# Altium PCB NXP_USB_Programmer.PcbDoc
Units mm, origin at the board's own origin, x right, y up, seen from the top; angles counter-clockwise.
Board outline 28 x 20.13 mm, 2 copper layers (Top Layer, Bottom Layer); 12 components, 12 nets, 68 pads, 21 vias.
Unrouted connection lines stored in the file: 1.
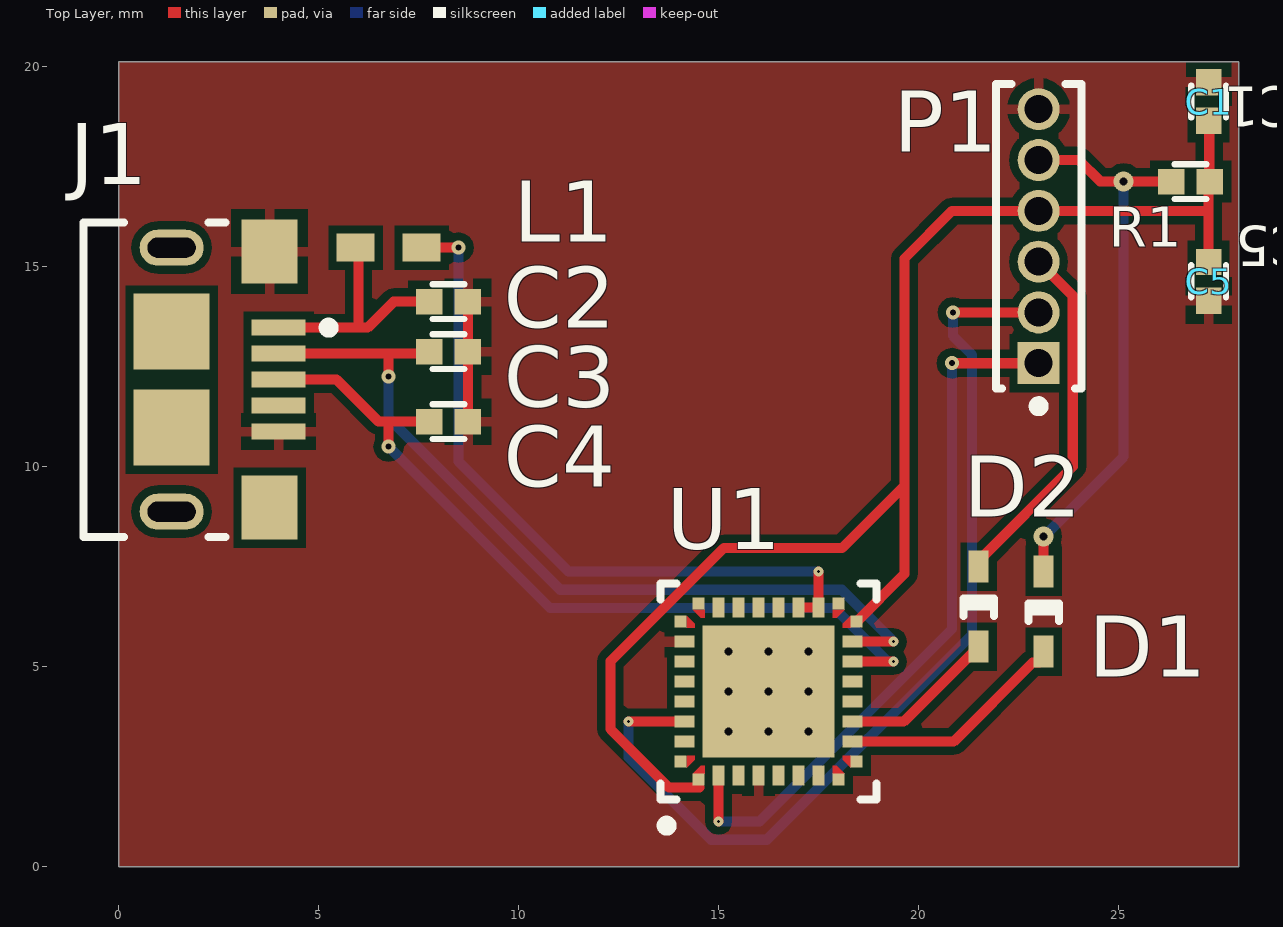
[diagram p0: Top Layer view]
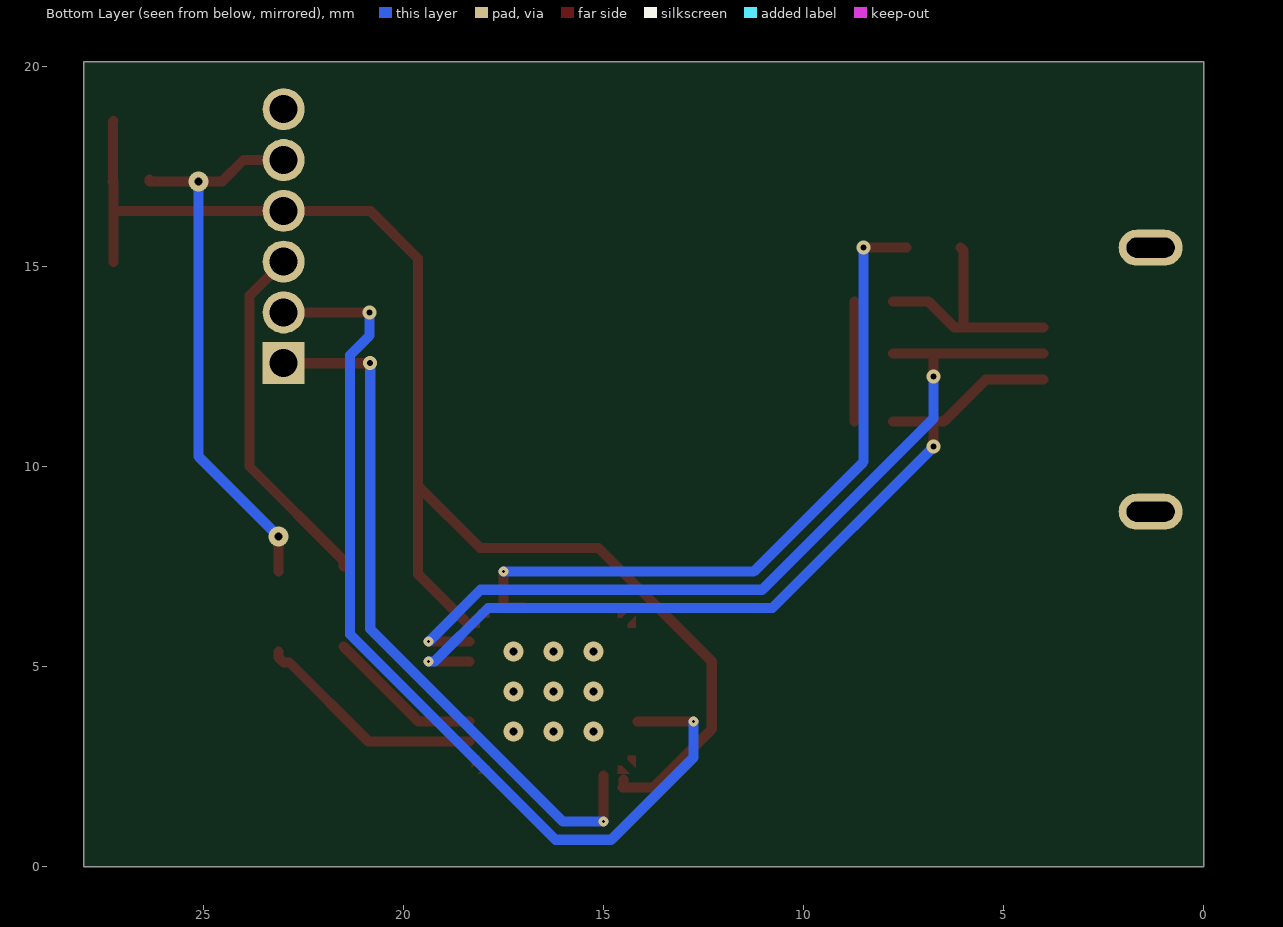
[diagram p1: Bottom Layer view, seen from below]

## Layer stack, top to bottom
Top Solder: solder mask 0.0102, Solder Resist, Dk 3.5
Top Layer: signal copper 0.0356
Dielectric 1: dielectric 0.32, FR-4, Dk 4.8
Bottom Layer: signal copper 0.0356
Bottom Solder: solder mask 0.0102, Solder Resist, Dk 3.5

## Board outline
0,0 28,0 28,20.125 0,20.125

## Design rules (kind name [scope] priority, off if disabled: settings)
Clearance [All] p1: gap=0.2 ignorepadtopadclearanceinfootprint=FALSE
MinimumSolderMaskSliver [All] p1: minsoldermaskwidth=0
PolygonConnect [All] p1: connectstyle=Relief reliefconductorwidth=0.254 reliefentries=4 polygonreliefangle="90 Angle" airgapwidth=0.254
RoutingVias [All] p1: holewidth=0.711 width=1.27 viastyle="Through Hole" minholewidth=0.01 minwidth=0.05 maxholewidth=0.711 maxwidth=2
SilkToSolderMaskClearance [IsPad] p1: minsilkscreentomaskgap=0.05 clearancetoexposedcopper=TRUE
SolderMaskExpansion [All] p1: expansion=0.102
Width [All] p1: maxlimit=0.254 minlimit=0.254 preferedwidth=0.254
28 further rules are at their usual default settings.

## Components (designator, comment, footprint, x,y, rotation, side; value= is the part's Value field where it differs from the comment)
C1 "CAP CER 0.1UF 16V X7R 0402" SM0402 27.25,19.125 r270 top
C2 "CAP CER 10000PF 16V X7R 0402" SM0402 8.25,14.125 r180 top value=10nF
C3 "CAP CER 47PF 50V NP0 0402" SM0402 8.25,12.875 r180 top
C4 "CAP CER 47PF 50V NP0 0402" SM0402 8.25,11.125 r180 top
C5 "CAP CER 0.1UF 16V X7R 0402" SM0402 27.25,14.635 r90 top
D1 "DIODE SCHOTTKY 30V 200MA SOD523" "DIODE SOD523" 23.125,6.375 r270 top
D2 "DIODE SCHOTTKY 30V 200MA SOD523" "DIODE SOD523" 21.5,6.5 r270 top
J1 "10118193-0001LF" FCI-10118193-0001LF-5_V 2.675,12.175 r270 top
L1 "FERRITE BEAD 470 OHM 0603 1LN" BLM18PG471SN1D 6.75,15.475 r0 top
P1 "CONN HEADER VERT 6POS 1.27MM" SLIN-GRPB061VWVN-RC_V 23,15.76 r90 top
R1 "RES 1K OHM 0.5% 1/16W 0402" SM0402 26.8,17.125 r0 top value="1000.00 Ohm"
U1 "FT232RQ-REEL" COM-UART-FT232R-SQ32 16.25,4.375 r90 top

## Footprints (in the part's own frame and the unit in brackets; to place one, negate y for a bottom-side part, rotate by r counter-clockwise, add the part's x,y. Pads: shape width x height; smd on the part's side, far side on the other; paste and mask are expansions set on the pad)
BLM18PG471SN1D [mm] "Chip Ferrite Bead, 2-Leads, Body 1.6x0.8mm, Height 0.95mm, Flow, 0.5 to 1.5A Rated Current"
  rect 0.95x0.7 smd: 1(-0.825,0) 2(0.825,0)
  body extent -0.8,-0.4 0.8,0.4, height 0.95
COM-UART-FT232R-SQ32 [mm] "QFN, 32-Leads, Body 5x5mm, Pitch 0.5mm, Thermal Pad 3.3x3.3mm, FTDI Recommended"
  rect 0.3x0.3 smd paste-0.15 mask-0.15: 1(-2.2,1.75) 8(-2.2,-1.75) 9(-1.75,-2.2) 16(1.75,-2.2) 17(2.2,-1.75) 24(2.2,1.75) 25(1.75,2.2) 32(-1.75,2.2)
  rect 0.5x0.3 smd paste-0.15 mask+0.06: 2(-2.1,1.25) 3(-2.1,0.75) 4(-2.1,0.25) 5(-2.1,-0.25) 6(-2.1,-0.75) 7(-2.1,-1.25) 18(2.1,-1.25) 19(2.1,-0.75) 20(2.1,-0.25) 21(2.1,0.25) 22(2.1,0.75) 23(2.1,1.25)
  rect 0.3x0.5 smd paste-0.15 mask+0.06: 10(-1.25,-2.1) 11(-0.75,-2.1) 12(-0.25,-2.1) 13(0.25,-2.1) 14(0.75,-2.1) 15(1.25,-2.1) 26(1.25,2.1) 27(0.75,2.1) 28(0.25,2.1) 29(-0.25,2.1) 30(-0.75,2.1) 31(-1.25,2.1)
  rect 3.3x3.3 smd paste-1.65 mask+0.06: 33(0,0)
  Top Layer region: 1.6,-1.85 1.6,-2.05 1.9,-2.05 1.7,-1.85
  Top Layer region: -1.6,2.05 -1.6,1.85 -1.7,1.85 -1.9,2.05
  Top Layer region: 1.6,2.05 1.6,1.85 1.7,1.85 1.9,2.05
  Top Layer region: -1.6,-2.05 -1.6,-1.85 -1.7,-1.85 -1.9,-2.05
  Top Layer region: -2.05,1.6 -1.85,1.6 -1.85,1.7 -2.05,1.9
  Top Layer region: 2.05,1.6 1.85,1.6 1.85,1.7 2.05,1.9
  Top Layer region: 2.05,-1.6 1.85,-1.6 1.85,-1.7 2.05,-1.9
  Top Layer region: -2.05,-1.6 -1.85,-1.6 -1.85,-1.7 -2.05,-1.9
  silkscreen extent -3.47,-2.7 2.7,2.7, body extent -2.55,-2.55 2.55,2.55, height 1
"DIODE SOD523" [mm] "SMD, 2-Leads, Body 1.2x0.8mm, Height 0.7mm"
  rect 0.8x0.5 smd: 1(-1,0) 2(1,0)
  silkscreen extent -0.2,-0.38 0.24,0.38, body extent -0.6,-0.4 0.6,0.4, height 0.71
FCI-10118193-0001LF-5_V [mm] "Micro, USB-B, 5-Leads, Body 7.86x5.05mm, Pitch 0.65 mm"
  rect 0.4x1.35 smd: 1(-1.3,1.325) 2(-0.65,1.325) 3(0,1.325) 4(0.65,1.325) 5(1.3,1.325)
  rect 1.6x1.4 smd: 6(-3.2,1.1) 7(3.2,1.1)
  rect 1.9x1.9 smd: 8(-1.2,-1.35) 9(1.2,-1.35)
  oval 0.9x1.6 hole 0.5 slot 1.2 at 90 deg: 10(-3.3,-1.35) 11(3.3,-1.35)
  silkscreen extent -3.93,-3.55 3.93,2.7, body extent -3.93,-4.16 3.93,1.5, height 2.83
SLIN-GRPB061VWVN-RC_V [mm] "Header, 6-Leads, Body 7.62x2.14mm, Pitch 1.27mm"
  rect 1.05x1.05 hole 0.7: 1(-3.175,0)
  round 1.05 hole 0.7: 2(-1.905,0) 3(-0.635,0) 4(0.635,0) 5(1.905,0) 6(3.175,0)
  silkscreen extent -4.37,-1.07 3.81,1.07, body extent -3.81,-1.07 3.81,1.07, height 4
SM0402 [mil]
  rect 26x25 smd: 1(-19,0) 2(19,0)
  silkscreen extent -16,-17 16,17, body extent -20,-10 20,10, height 22

## Part data
C1 C5: library part CC0402KRX7R7BB104, "0.1µF ±10% 16V Ceramic Capacitor X7R 0402 (1005 Metric)", Capacitance=100nF, Case/Package=0402, Case Code (Metric)=1005, Dielectric=X7R, Manufacturer=Yageo, Max Operating Temperature=125°C, Min Operating Temperature=-55°C, Package Quantity=1, Supplier Part Number 1=311-1338-1-ND, Tolerance=10%, Voltage=16V, Case Code (Imperial)=0402, ComponentLink1Description=CC0402KRX7R7BB104, ComponentLink1URL=https://www.digikey.com/products/en/capacitors/ceramic-capacitors/60?k=CC0402KRX7R7BB104&k=&pkeyword=CC0402KRX7R7BB104&sv=0&pv7=2&sf=0&quantity=&ColumnSort=0&page=1&pageSize=25, ComponentLink2Description=https://datasheet.ciiva.com/11788/0900766b80ce67ed-11788364.pdf?src-supplier=RSComponents, ComponentLink2URL=https://datasheet.ciiva.com/11788/0900766b80ce67ed-11788364.pdf?src-supplier=RSComponents, ComponentLink3Description=https://datasheet.ciiva.com/16625/upy-gphc-x7r-6-3v-to-50v-8-16625511.pdf?src-supplier=Avnet+Europe, ComponentLink3URL=https://datasheet.ciiva.com/16625/upy-gphc-x7r-6-3v-to-50v-8-16625511.pdf?src-supplier=Avnet+Europe, ComponentLink4Description=https://datasheet.ciiva.com/161/mlccorderingcode-161544.pdf?src-supplier=Digi-Key, ComponentLink4URL=https://datasheet.ciiva.com/161/mlccorderingcode-161544.pdf?src-supplier=Digi-Key, ComponentLink5Description=https://datasheet.ciiva.com/161/mlccorderingcode-161545.pdf?src-supplier=Digi-Key, ComponentLink5URL=https://datasheet.ciiva.com/161/mlccorderingcode-161545.pdf?src-supplier=Digi-Key, ComponentLink6Description=https://datasheet.ciiva.com/11587/upy-gphc-x7r-6-3v-to-50v-8-11587305.pdf?src-supplier=Avnet, ComponentLink6URL=https://datasheet.ciiva.com/11587/upy-gphc-x7r-6-3v-to-50v-8-11587305.pdf?src-supplier=Avnet, ComponentLink7Description=https://datasheet.ciiva.com/161/mlccorderingcode-161546.pdf?src-supplier=Digi-Key, ComponentLink7URL=https://datasheet.ciiva.com/161/mlccorderingcode-161546.pdf?src-supplier=Digi-Key, ComponentLink8Description=https://datasheet.ciiva.com/13395/upy-gphc-x7r-6-3v-to-50v-8-13395676.pdf?src-supplier=Mouser, ComponentLink8URL=https://datasheet.ciiva.com/13395/upy-gphc-x7r-6-3v-to-50v-8-13395676.pdf?src-supplier=Mouser, ComponentLink9Description=https://datasheet.ciiva.com/8033/1734573-8033661.pdf?src-supplier=Element14, ComponentLink9URL=https://datasheet.ciiva.com/8033/1734573-8033661.pdf?src-supplier=Element14, ComponentLink10Description=https://datasheet.ciiva.com/7978/1489800-7978111.pdf?src-supplier=Element14, ComponentLink10URL=https://datasheet.ciiva.com/7978/1489800-7978111.pdf?src-supplier=Element14, ComponentLink11Description=https://datasheet.ciiva.com/8033/1734573-8033663.pdf?src-supplier=Element14, ComponentLink11URL=https://datasheet.ciiva.com/8033/1734573-8033663.pdf?src-supplier=Element14, ComponentLink12Description=https://datasheet.ciiva.com/28450/1489800-28450335.pdf?src-supplier=Element14, ComponentLink12URL=https://datasheet.ciiva.com/28450/1489800-28450335.pdf?src-supplier=Element14, Composition=Ceramic, Depth=0.5mm, Halogen Free="Halogen Free", Height=0.5mm, Lead Free="Lead Free", Length=1mm, Manufacturer Part Number=CC0402KRX7R7BB104, Mount="Surface Mount", Number of Pins=2, Packaging="Tape and Reel", Pricing 1="1 = 0.10000, 10 = 0.03800, 100 = 0.01700, 500 = 0.01216, 1000 = 0.00956, 2500 = 0.00869, 5000 = 0.00799 (USD)", Radiation Hardening=No, REACH SVHC="No SVHC", Stock 1=38597495, Supplier 1=Digi-Key, Termination=SMD/SMT, Thickness=0.022inch, Voltage Rating=16V, Voltage Rating (DC)=16V, Width=0.02inch
C2: library part C0402C103K4RALTU, "10000pF ±10% 16V Ceramic Capacitor X7R 0402 (1005 Metric)", Capacitance=10nF, Case-EIA=0402, Case-Metric=1005, Dielectric=X7R, Dielectric Material=Ceramic, Manufacturer=KEMET, Max Operating Temperature=125°C, Min Operating Temperature=-55°C, Package Quantity=1, Rated Voltage="16 V", Supplier Part Number 1=399-6340-1-ND, Tolerance=±10%, Voltage Rating=16V, Case/Package=0402, Case Code (Imperial)=0402, Case Code (Metric)=1005, ComponentLink1Description=C0402C103K4RALTU, ComponentLink1URL=https://www.digikey.com/products/en/capacitors/ceramic-capacitors/60?k=C0402C103K4RALTU&k=&pkeyword=C0402C103K4RALTU&sv=0&pv7=2&sf=0&quantity=&ColumnSort=0&page=1&pageSize=25, ComponentLink2Description=http://components.arrow.com/part/dataview/46124281S9906155N7429?src-supplier=Arrow, ComponentLink2URL=http://components.arrow.com/part/dataview/46124281S9906155N7429?src-supplier=Arrow, ComponentLink3Description=http://www.mouser.com/ds/2/212/KEM_C1018_X7R_SnPb_SMD-1102795.pdf?src-supplier=Mouser, ComponentLink3URL=http://www.mouser.com/ds/2/212/KEM_C1018_X7R_SnPb_SMD-1102795.pdf?src-supplier=Mouser, ComponentLink4Description=https://search.kemet.com/component-edge/download/datasheet/C0402C103K4RALTU.pdf?src-supplier=Digi-Key, ComponentLink4URL=https://search.kemet.com/component-edge/download/datasheet/C0402C103K4RALTU.pdf?src-supplier=Digi-Key, ComponentLink5Description=https://api.kemet.com/component-edge/download/datasheet/C0402C103K4RALTU.pdf?src-supplier=Digi-Key, ComponentLink5URL=https://api.kemet.com/component-edge/download/datasheet/C0402C103K4RALTU.pdf?src-supplier=Digi-Key, ComponentLink6Description=http://datasheet.octopart.com/C0402C103K4RALTU-Kemet-datasheet-62307648.pdf?src-supplier=Element14, ComponentLink6URL=http://datasheet.octopart.com/C0402C103K4RALTU-Kemet-datasheet-62307648.pdf?src-supplier=Element14, ComponentLink7Description=http://datasheet.octopart.com/C0402C103K4RALTU-KEMET-datasheet-83561409.pdf?src-supplier=Newark, ComponentLink7URL=http://datasheet.octopart.com/C0402C103K4RALTU-KEMET-datasheet-83561409.pdf?src-supplier=Newark, ComponentLink8Description=http://datasheet.octopart.com/C0402C103K4RALTU-KEMET-datasheet-86448208.pdf?src-supplier=Farnell, ComponentLink8URL=http://datasheet.octopart.com/C0402C103K4RALTU-KEMET-datasheet-86448208.pdf?src-supplier=Farnell, ComponentLink9Description=http://datasheet.octopart.com/C0402C103K4RALTU-KEMET-datasheet-84169754.pdf, ComponentLink9URL=http://datasheet.octopart.com/C0402C103K4RALTU-KEMET-datasheet-84169754.pdf, Depth=0.5mm, Dissipation Factor=3.5%, Height=0.5mm, Length=1mm, Manufacturer Part Number=C0402C103K4RALTU, Max Thickness="0.6 mm", Mount="Surface Mount", Packaging="Tape and Reel", Pricing 1="1 = 0.76000, 10 = 0.56400, 100 = 0.38640, 500 = 0.30590, 1000 = 0.25760, 2500 = 0.24150, 5000 = 0.23345 (USD)", Radiation Hardening=No, Stock 1=75494, Supplier 1=Digi-Key, Technology=SMT, Termination=SMD/SMT, Thickness=0.022inch, Voltage Rating (DC)=16V, Width=0.02inch
C3 C4: library part C0402C470D5GACTU, "47pF ±0.5pF 50V Ceramic Capacitor C0G, NP0 0402 (1005 Metric)", Capacitance=47pF, Case/Package=0402, Case Code (Metric)=1005, Dielectric=C0G, Dielectric Material=Ceramic, Manufacturer=KEMET, Max Operating Temperature=125°C, Min Operating Temperature=-55°C, Package Quantity=10000, Supplier Part Number 1=C0402C470D5GACTU-ND, Voltage Rating=50V, Case Code (Imperial)=0402, ComponentLink1Description=C0402C470D5GACTU, ComponentLink1URL=https://www.digikey.com/product-detail/en/C0402C470D5GACTU/C0402C470D5GACTU-ND/2196707?utm_campaign=buynow&WT.z_cid=ref_octopart_dkc_buynow&utm_medium=aggregator&curr=usd&site=us&utm_source=octopart, ComponentLink2Description=https://datasheet.ciiva.com/5421/kem-c1003-c0g-smd-5421883.pdf?src-supplier=Mouser, ComponentLink2URL=https://datasheet.ciiva.com/5421/kem-c1003-c0g-smd-5421883.pdf?src-supplier=Mouser, ComponentLink3Description=http://datasheet.octopart.com/C0402C470D5GACTU-KEMET-datasheet-84169754.pdf, ComponentLink3URL=http://datasheet.octopart.com/C0402C470D5GACTU-KEMET-datasheet-84169754.pdf, Height=0.5mm, Lead Free="Lead Free", Lead Pitch=0.3mm, Length=0.039inch, Manufacturer Part Number=C0402C470D5GACTU, Mount="Surface Mount", Packaging="Tape and Reel", Pricing 1="10000 = 0.39203 (USD)", Stock 1=0, Supplier 1=Digi-Key, Termination=SMD/SMT, Thickness=0.022inch, Voltage Rating (DC)=50V, Width=0.02inch
D1 D2: library part RB521S30,115, "Schottky Barrier Diode, 30 V, 0.2 A, -55 to 125 degC, 2-Pin SOD523F, RoHS, Tape and Reel", Capacitance @ Vr, F="20pF @ 1V, 1MHz", Current - Average Rectified (Io)="200mA (DC)", Manufacturer=Nexperia, Supplier Part Number 1=1727-6493-1-ND, ComponentLink1Description=RB521S30,115, ComponentLink1URL=https://www.digikey.com/product-detail/en/nexperia-usa-inc/RB521S30115/1727-6493-1-ND/2773925, ComponentLink2Description=http://datasheet.octopart.com/RB521S30%2C115-Nexperia-datasheet-87582339.pdf?src-supplier=Nexperia, ComponentLink2URL=http://datasheet.octopart.com/RB521S30%2C115-Nexperia-datasheet-87582339.pdf?src-supplier=Nexperia, ComponentLink3Description=http://datasheet.octopart.com/RB521S30%2C115-Nexperia-datasheet-10674343.pdf?src-supplier=NXP+Semiconductors, ComponentLink3URL=http://datasheet.octopart.com/RB521S30%2C115-Nexperia-datasheet-10674343.pdf?src-supplier=NXP+Semiconductors, ComponentLink4Description=http://datasheet.octopart.com/RB521S30%2C115-Philips-datasheet-14055121.pdf?src-supplier=IIIC, ComponentLink4URL=http://datasheet.octopart.com/RB521S30%2C115-Philips-datasheet-14055121.pdf?src-supplier=IIIC, Manufacturer Part Number=RB521S30,115, Pricing 1="1 = 0.27000, 10 = 0.22100, 100 = 0.11740, 500 = 0.07726, 1000 = 0.05253 (USD)", Stock 1=15636, Supplier 1=Digi-Key
J1: "USB - micro B USB 2.0 Receptacle Connector 5 Position Surface Mount, Right Angle; Through Hole", Manufacturer="Amphenol ICC", ComponentLink1Description=609-4616-1-ND, ComponentLink1URL=https://www.digikey.com/products/en/connectors-interconnects/usb-dvi-hdmi-connectors/312?k=10118193-0001LF&k=&pkeyword=10118193-0001LF&sv=0&pv7=2&sf=0&quantity=&ColumnSort=0&page=1&pageSize=25, ComponentLink2Description=http://datasheet.octopart.com/10118193-0001LF-FCI-datasheet-55953155.pdf?src-supplier=TME, ComponentLink2URL=http://datasheet.octopart.com/10118193-0001LF-FCI-datasheet-55953155.pdf?src-supplier=TME, ComponentLink3Description=http://datasheet.octopart.com/10118193-0001LF-FCI-datasheet-11792339.pdf?src-supplier=Arrow, ComponentLink3URL=http://datasheet.octopart.com/10118193-0001LF-FCI-datasheet-11792339.pdf?src-supplier=Arrow, ComponentLink4Description=http://datasheet.octopart.com/10118193-0001LF-FCI-datasheet-13702206.pdf?src-supplier=Allied+Electronics, ComponentLink4URL=http://datasheet.octopart.com/10118193-0001LF-FCI-datasheet-13702206.pdf?src-supplier=Allied+Electronics, ComponentLink5Description=http://datasheet.octopart.com/10118193-0001LF-Amphenol-datasheet-96019471.pdf?src-supplier=Newark, ComponentLink5URL=http://datasheet.octopart.com/10118193-0001LF-Amphenol-datasheet-96019471.pdf?src-supplier=Newark, ComponentLink6Description=http://datasheet.octopart.com/10118193-0001LF-Amphenol-ICC-datasheet-96019471.pdf?src-supplier=Element14, ComponentLink6URL=http://datasheet.octopart.com/10118193-0001LF-Amphenol-ICC-datasheet-96019471.pdf?src-supplier=Element14, ComponentLink7Description=http://datasheet.octopart.com/10118193-0001LF-Amphenol-ICC-datasheet-55953155.pdf?src-supplier=Future+Electronics, ComponentLink7URL=http://datasheet.octopart.com/10118193-0001LF-Amphenol-ICC-datasheet-55953155.pdf?src-supplier=Future+Electronics, ComponentLink8Description=http://datasheet.octopart.com/10118193-0001LF-Amphenol-ICC-datasheet-116246833.pdf?src-supplier=Future+Electronics, ComponentLink8URL=http://datasheet.octopart.com/10118193-0001LF-Amphenol-ICC-datasheet-116246833.pdf?src-supplier=Future+Electronics, ComponentLink9Description=http://datasheet.octopart.com/10118193-0001LF-ICC-datasheet-96019471.pdf?src-supplier=Farnell, ComponentLink9URL=http://datasheet.octopart.com/10118193-0001LF-ICC-datasheet-96019471.pdf?src-supplier=Farnell, ComponentLink10Description=http://datasheet.octopart.com/10118193-0001LF-ICC-datasheet-55953155.pdf?src-supplier=Farnell, ComponentLink10URL=http://datasheet.octopart.com/10118193-0001LF-ICC-datasheet-55953155.pdf?src-supplier=Farnell, Description2="Conn Micro USB Type B", Manufacturer Part Number=10118193-0001LF, Pricing 1="1200 = 0.20150, 2400 = 0.18370, 4800 = 0.17130, 9600 = 0.15910, 24000 = 0.15810, 1 = 0.42060, 10 = 0.30000, 25 = 0.29990, 100 = 0.28820, 250 = 0.28160, 500 = 0.24750, 1000 = 0.24300, 3000 = 0.19000, 6000 = 0.17370 (USD)", Stock 1=8400, Supplier 1="Arrow Electronics Inc.", Supplier Part Number 1=10118193-0001LF
L1: library part BLM18PG471SN1D, "470 Ohms @ 100MHz 1 Power Line Ferrite Bead 0603 (1608 Metric) 1A 200mOhm", Case/Package=0603, Case Code (Metric)=1608, Current Rating=1A, DC Resistance (DCR)=200mR, Manufacturer=Murata, Max Operating Temperature=125°C, Min Operating Temperature=-55°C, Package Quantity=1, Supplier Part Number 1=490-5223-1-ND, Test Frequency=100MHz, Tolerance=25%, Case Code (Imperial)=0603, ComponentLink1Description="Manufacturer URL", ComponentLink1URL=http://www.murata.com/, ComponentLink2Description=Datasheet, ComponentLink2URL=http://www.murata.com/products/catalog/pdf/c31e.pdf, ComponentLink3Description="Package Specification", ComponentLink3URL=http://www.murata.com/products/catalog/pdf/c31e.pdf, ComponentLink4Description=BLM18PG471SN1D, ComponentLink4URL=https://www.digikey.com/products/en/filters/ferrite-beads-and-chips/841?k=BLM18PG471SN1D&k=&pkeyword=BLM18PG471SN1D&sv=0&pv7=2&sf=0&quantity=&ColumnSort=0&page=1&pageSize=25, ComponentLink5Description=https://datasheet.ciiva.com/11800/0900766b81275ca5-11800885.pdf?src-supplier=RSComponents, ComponentLink5URL=https://datasheet.ciiva.com/11800/0900766b81275ca5-11800885.pdf?src-supplier=RSComponents, ComponentLink6Description=https://datasheet.ciiva.com/8021/1740433-8021497.pdf?src-supplier=Element14, ComponentLink6URL=https://datasheet.ciiva.com/8021/1740433-8021497.pdf?src-supplier=Element14, ComponentLink7Description=https://datasheet.ciiva.com/6212/l0110s0100blm18p-6212508.pdf?src-supplier=Digi-Key, ComponentLink7URL=https://datasheet.ciiva.com/6212/l0110s0100blm18p-6212508.pdf?src-supplier=Digi-Key, ComponentLink8Description=https://datasheet.ciiva.com/6212/l0110s0100blm18p-6212509.pdf?src-supplier=Digi-Key, ComponentLink8URL=https://datasheet.ciiva.com/6212/l0110s0100blm18p-6212509.pdf?src-supplier=Digi-Key, ComponentLink9Description=https://datasheet.ciiva.com/16331/l0110s0100blm18p-16331542.pdf?src-supplier=Future+Electronics, ComponentLink9URL=https://datasheet.ciiva.com/16331/l0110s0100blm18p-16331542.pdf?src-supplier=Future+Electronics, ComponentLink10Description=https://datasheet.ciiva.com/6212/l0110s0100blm18p-6212506.pdf?src-supplier=Digi-Key, ComponentLink10URL=https://datasheet.ciiva.com/6212/l0110s0100blm18p-6212506.pdf?src-supplier=Digi-Key, ComponentLink11Description=https://datasheet.ciiva.com/8021/1740433-8021498.pdf?src-supplier=Element14, ComponentLink11URL=https://datasheet.ciiva.com/8021/1740433-8021498.pdf?src-supplier=Element14, ComponentLink12Description=https://datasheet.ciiva.com/14122/blm-series-eng-tds-14122876.pdf?src-supplier=Distrelec, ComponentLink12URL=https://datasheet.ciiva.com/14122/blm-series-eng-tds-14122876.pdf?src-supplier=Distrelec, ComponentLink13Description=https://datasheet.ciiva.com/8508/l0110s0100blm18p-8508303.pdf?src-supplier=Avnet, ComponentLink13URL=https://datasheet.ciiva.com/8508/l0110s0100blm18p-8508303.pdf?src-supplier=Avnet, ComponentLink14Description=http://datasheet.octopart.com/BLM18PG471SN1D-Murata-datasheet-11754816.pdf?src-supplier=Element14, ComponentLink14URL=http://datasheet.octopart.com/BLM18PG471SN1D-Murata-datasheet-11754816.pdf?src-supplier=Element14, ComponentLink15Description=http://datasheet.octopart.com/BLM18PG471SN1D-Murata-datasheet-8326388.pdf?src-supplier=_legacy+Avnet, ComponentLink15URL=http://datasheet.octopart.com/BLM18PG471SN1D-Murata-datasheet-8326388.pdf?src-supplier=_legacy+Avnet, ComponentLink16Description=http://datasheet.octopart.com/BLM18PG471SN1D-Murata-datasheet-503348.pdf?src-supplier=_legacy+Avnet, ComponentLink16URL=http://datasheet.octopart.com/BLM18PG471SN1D-Murata-datasheet-503348.pdf?src-supplier=_legacy+Avnet, ComponentLink17Description=http://datasheet.octopart.com/BLM18PG471SN1D-Murata-datasheet-35449.pdf?src-supplier=Farnell, ComponentLink17URL=http://datasheet.octopart.com/BLM18PG471SN1D-Murata-datasheet-35449.pdf?src-supplier=Farnell, ComponentLink18Description=http://datasheet.octopart.com/BLM18PG471SN1D-Murata-datasheet-62086344.pdf?src-supplier=Future+Electronics, ComponentLink18URL=http://datasheet.octopart.com/BLM18PG471SN1D-Murata-datasheet-62086344.pdf?src-supplier=Future+Electronics, ComponentLink19Description=http://datasheet.octopart.com/BLM18PG471SN1D-Murata-datasheet-62117746.pdf?src-supplier=TME, ComponentLink19URL=http://datasheet.octopart.com/BLM18PG471SN1D-Murata-datasheet-62117746.pdf?src-supplier=TME, ComponentLink20Description=http://datasheet.octopart.com/BLM18PG471SN1D-Murata-datasheet-37129980.pdf, ComponentLink20URL=http://datasheet.octopart.com/BLM18PG471SN1D-Murata-datasheet-37129980.pdf, Core Material=Ferrite, DC Current=1A, Depth=0.8mm, Height=0.8mm, Impedance=470R, Lead Free="Lead Free", Length=1.6mm, Manufacturer Part Number=BLM18PG471SN1D, Material=Steel, Max Current Rating=1A, Max DC Current=1A, Military Standard=Not, Number of Circuits=1, Number of Lines=1, Number of Pins=2, Packaging="Tape and Reel", Pricing 1="1 = 0.10000, 10 = 0.07600, 25 = 0.06840, 50 = 0.05000, 100 = 0.04330, 250 = 0.03416, 500 = 0.02884, 1000 = 0.02429 (USD)", Radiation Hardening=No, REACH SVHC="No SVHC", Resistance=200mR, Stock 1=2280, Supplier 1=Digi-Key, Termination=SMD/SMT, Width=0.8mm
P1: library part GRPB061VWVN-RC, "Connector Header Through Hole 6 position 0.050\" (1.27mm)", Manufacturer=Sullins, Package Quantity=1, Supplier Part Number 1=S9014E-06-ND, ComponentLink1Description=GRPB061VWVN-RC, ComponentLink1URL=https://www.digikey.com/products/en?keywords=GRPB061VWVN-RC, ComponentLink2Description=https://datasheet.ciiva.com/726/71-grpb-1vwvn-rc-10957-c-726652.pdf?src-supplier=Digi-Key, ComponentLink2URL=https://datasheet.ciiva.com/726/71-grpb-1vwvn-rc-10957-c-726652.pdf?src-supplier=Digi-Key, ComponentLink3Description=http://datasheet.octopart.com/GRPB061VWVN-RC-Sullins-datasheet-12514290.pdf?src-supplier=Future+Electronics, ComponentLink3URL=http://datasheet.octopart.com/GRPB061VWVN-RC-Sullins-datasheet-12514290.pdf?src-supplier=Future+Electronics, ComponentLink4Description=http://datasheet.octopart.com/GRPB061VWVN-RC-Sullins-datasheet-34148777.pdf?src-supplier=Future+Electronics, ComponentLink4URL=http://datasheet.octopart.com/GRPB061VWVN-RC-Sullins-datasheet-34148777.pdf?src-supplier=Future+Electronics, Connector Type="Male Pin", Contact Mating Length=0.118inch, Contact Plating=Gold, Lead Free="Lead Free", Manufacturer Part Number=GRPB061VWVN-RC, Mount="Through Hole", Number of Positions=6, Number of Rows=1, Packaging=Bulk, Pitch=0.05inch, Pricing 1="1 = 0.48000, 10 = 0.44800, 100 = 0.34360, 500 = 0.29880, 1000 = 0.24651, 5000 = 0.21663, 10000 = 0.21580 (USD)", Stock 1=23780, Supplier 1=Digi-Key, Termination=Solder
R1: library part RNCF0402DTE1K00, "1 kOhms ±0.5% 0.063W, 1/16W Chip Resistor 0402 (1005 Metric) Automotive AEC-Q200 Thin Film", Case-EIA=0402, Case-Metric=1005, Manufacturer="Stackpole Electronics", Max Operating Temperature=155°C, Min Operating Temperature=-55°C, Power="0.063 W", Power Rating=63mW, Resistance=1kR, Supplier Part Number 1=RNCF0402DTE1K00CT-ND, Tolerance="1 %", Case/Package=0402, ComponentLink1Description=RNCF0402DTE1K00, ComponentLink1URL=https://www.digikey.com/products/en/resistors/chip-resistor-surface-mount/52?k=RNCF0402DTE1K00&k=&pkeyword=RNCF0402DTE1K00&sv=0&pv7=2&sf=0&quantity=&ColumnSort=0&page=1&pageSize=25, Manufacturer Part Number=RNCF0402DTE1K00, Mount="Surface Mount", Packaging="Tape and Reel", Pricing 1="1 = 0.13000, 10 = 0.12000, 100 = 0.04620, 1000 = 0.02033, 2500 = 0.01756, 5000 = 0.01571 (USD)", RoHS=No, Stock 1=17585, Supplier 1=Digi-Key, Technology=SMT
U1: library part COM-UART-FT232R-SQ32, "USB Bridge, USB to UART USB 2.0 UART Interface 32-QFN (5x5)", Case/Package="QFN EP", Manufacturer=FTDI, Max Operating Temperature=85°C, Max Supply Voltage=5.25V, Min Operating Temperature=-40°C, Min Supply Voltage=3.3V, Operating Supply Current=15mA, Operating Supply Voltage=5V, Package Quantity=6000, Supplier Part Number 1=768-1008-1-ND, ComponentLink1Description=FT232RQ-REEL, ComponentLink1URL=https://www.digikey.com/products/en/integrated-circuits-ics/interface-controllers/753?k=FT232R&k=&pkeyword=FT232R&sv=0&pv16=4404&sf=0&FV=ffe002f1%2C1c0002%2C1c0006&quantity=&ColumnSort=0&page=1&pageSize=25, ComponentLink2Description=https://datasheet.ciiva.com/1505/1647396-1505445.pdf?src-supplier=Digi-Key, ComponentLink2URL=https://datasheet.ciiva.com/1505/1647396-1505445.pdf?src-supplier=Digi-Key, ComponentLink3Description=https://datasheet.ciiva.com/26841/ft232rq-reel-26841082.pdf?src-supplier=IIIC, ComponentLink3URL=https://datasheet.ciiva.com/26841/ft232rq-reel-26841082.pdf?src-supplier=IIIC, ComponentLink4Description=https://datasheet.ciiva.com/1787/ds-ft232r-1787041.pdf?src-supplier=Digi-Key, ComponentLink4URL=https://datasheet.ciiva.com/1787/ds-ft232r-1787041.pdf?src-supplier=Digi-Key, ComponentLink5Description=https://datasheet.ciiva.com/1787/ds-ft232r-1787042.pdf?src-supplier=Digi-Key, ComponentLink5URL=https://datasheet.ciiva.com/1787/ds-ft232r-1787042.pdf?src-supplier=Digi-Key, ComponentLink6Description=https://datasheet.ciiva.com/16438/ds-ft232r-16438555.pdf?src-supplier=Future+Electronics, ComponentLink6URL=https://datasheet.ciiva.com/16438/ds-ft232r-16438555.pdf?src-supplier=Future+Electronics, ComponentLink7Description=https://datasheet.ciiva.com/15150/getdatasheetpartid-644721-15150509.pdf?src-supplier=Verical, ComponentLink7URL=https://datasheet.ciiva.com/15150/getdatasheetpartid-644721-15150509.pdf?src-supplier=Verical, ComponentLink8Description=https://datasheet.ciiva.com/4787/ds-ft232r-4787663.pdf?src-supplier=Mouser, ComponentLink8URL=https://datasheet.ciiva.com/4787/ds-ft232r-4787663.pdf?src-supplier=Mouser, ComponentLink9Description=http://datasheet.octopart.com/FT232RQ-REEL-FTDI-datasheet-11992319.pdf?src-supplier=Allied+Electronics, ComponentLink9URL=http://datasheet.octopart.com/FT232RQ-REEL-FTDI-datasheet-11992319.pdf?src-supplier=Allied+Electronics, ComponentLink10Description=http://datasheet.octopart.com/FT232RQ-REEL-FTDI-datasheet-44209889.pdf?src-supplier=Newark, ComponentLink10URL=http://datasheet.octopart.com/FT232RQ-REEL-FTDI-datasheet-44209889.pdf?src-supplier=Newark, ComponentLink11Description=http://datasheet.octopart.com/FT232RQ-REEL-FTDI-datasheet-10427816.pdf?src-supplier=Arrow, ComponentLink11URL=http://datasheet.octopart.com/FT232RQ-REEL-FTDI-datasheet-10427816.pdf?src-supplier=Arrow, ComponentLink12Description=http://datasheet.octopart.com/FT232RQ-REEL-FTDI-datasheet-15949903.pdf?src-supplier=IIIC, ComponentLink12URL=http://datasheet.octopart.com/FT232RQ-REEL-FTDI-datasheet-15949903.pdf?src-supplier=IIIC, ComponentLink13Description=http://datasheet.octopart.com/FT232RQ-REEL-FTDI-datasheet-68321328.pdf?src-supplier=TME, ComponentLink13URL=http://datasheet.octopart.com/FT232RQ-REEL-FTDI-datasheet-68321328.pdf?src-supplier=TME, Data Rate=12Mbps, Interface=UART, Lead Free="Lead Free", Length=5mm, Manufacturer Part Number=FT232RQ-REEL, Mount="Surface Mount", Number of Channels=1, Number of Pins=32, Packaging="Tape and Reel", Pricing 1="1 = 4.50000, 10 = 4.05000, 50 = 3.85000, 100 = 3.65000, 250 = 3.25000, 500 = 2.85002, 1000 = 2.65000, 2500 = 2.35000 (USD)", Radiation Hardening=No, Stock 1=57058, Supplier 1=Digi-Key, Weight=0.006653oz, Width=5mm

## Via types
v1: diameter 0.5, hole 0.2, Top Layer to Bottom Layer, tented top, 11 vias
v2: diameter 0.25, hole 0.075, Top Layer to Bottom Layer, 5 vias
v3: diameter 0.35, hole 0.15, Top Layer to Bottom Layer, 5 vias

## Nets (pads, with @x,y where several pads share a name; then routed paths per layer and width w, separated by ;. In a path a pad name is that pad's centre, name@x,y a point inside that pad or via, vN(x,y) a via of type N, cw(c..) or ccw(c..) an arc to the next point about the centre after c; other vN are vias at no path point)
3V3: C1.2 C5.2 P1.4 R1.2 U1.1 U1.16 | length 35.1
  Top Layer w0.254: U1.1 14.5,1.998 14.523,1.975 13.758,1.975 12.296,3.437 12.296,5.133 15.13,7.968 18.088,7.968 19.645,9.525 ; U1.16 19.645,7.32 19.645,9.525 ; C5.2 27.25,16.395 ; R1.2@27.25,17.125 27.25,16.395 ; C1.2 27.266,18.626 27.266,17.141 R1.2 ; 19.645,9.525 19.645,15.205 20.835,16.395 P1.4 27.25,16.395
GND: C1.1 C2.1 C3.1 C4.1 C5.1 J1.5 J1.6 P1.6 U1.4 U1.17 U1.20 U1.24 U1.26 U1.33 | length 3
  Top Layer w0.254: C4.1 C3.1 C2.1
  other v1: 15.25,3.375 16.25,3.375 17.25,3.375 15.25,4.375 16.25,4.375 17.25,4.375 15.25,5.375 16.25,5.375 17.25,5.375
NetC2_2: C2.2 J1.1 L1.1 | length 6.1
  Top Layer w0.254: J1.1 6,13.475 ; L1.1@6.075,15.475 6,15.4 6,13.475 ; C2.2 6.875,14.125 6.225,13.475 6,13.475
NetC3_2: C3.2 J1.2 U1.15 | length 21.3
  Top Layer w0.254: J1.2 6.75,12.825 ; v3(6.75,12.25) 6.75,12.825 ; C3.2@7.767,12.825 6.75,12.825 ; U1.15 v2(19.375,5.625)
  Bottom Layer w0.254: v3(6.75,12.25) 6.75,11.21 11.039,6.921 18.079,6.921 v2(19.375,5.625)
NetC4_2: C4.2 J1.3 U1.14 | length 20.7
  Top Layer w0.254: J1.3 5.45,12.175 6.5,11.125 6.75,11.125 ; v3(6.75,10.5) 6.75,11.125 ; C4.2 6.75,11.125 ; U1.14 v2(19.375,5.125)
  Bottom Layer w0.254: v3(6.75,10.5) 10.783,6.467 17.891,6.467 19.233,5.125 v2(19.375,5.125)
NetD1_2: D1.2 U1.10 | length 5.8
  Top Layer w0.254: U1.10 20.875,3.125 22.852,5.102 23.002,5.102 23.125,5.225 D1.2
NetD2_2: D2.2 U1.11 | length 3.9
  Top Layer w0.254: U1.11 19.625,3.625 D2.2
NetL1_2: L1.2 U1.18 U1.19 | length 18
  Top Layer w0.254: L1.2@7.425,15.475 v3(8.5,15.475) ; U1.19 U1.18 v2(17.5,7.375)
  Bottom Layer w0.254: v3(8.5,15.475) 8.5,10.125 11.25,7.375 v2(17.5,7.375)
RESET_N: D1.1 P1.5 R1.1 | length 14.2
  Top Layer w0.254: P1.5 24.003,17.665 24.537,17.131 26.344,17.131 26.35,17.125 R1.1@26.35,17.175 ; D1.1 v1(23.125,8.25)
  Bottom Layer w0.254: v1(23.125,8.25) 25.125,10.25 v1(25.125,17.131)
RXD: P1.1 U1.2 | length 17.8
  Top Layer w0.254: v2(15,1.125) U1.2 ; v3(20.835,12.585) P1.1
  Bottom Layer w0.254: v2(15,1.125) 16.017,1.125 20.835,5.943 v3(20.835,12.585)
SPIMISO: D2.1 P1.3 | length 9
  Top Layer w0.254: D2.1 21.5,7.65 23.852,10.002 23.852,14.273 P1.3
TXD: P1.2 U1.30 | length 24.3
  Top Layer w0.254: v2(12.75,3.625) U1.30 ; v3(20.855,13.855) P1.2
  Bottom Layer w0.254: v2(12.75,3.625) 12.75,2.733 14.812,0.671 16.205,0.671 21.337,5.803 21.337,12.793 20.855,13.275 v3(20.855,13.855)
pads on no net: J1.4 J1.7 J1.8 J1.9 J1.10 J1.11 U1.3 U1.5 U1.6 U1.7 U1.8 U1.9 U1.12 U1.13 U1.21 U1.22 U1.23 U1.25 U1.27 U1.28 U1.29 U1.31 U1.32

## Polygon pours and split planes (outlines as drawn)
GND on Top Layer "GND" (solid, pour order 2): 0,0 28,0 28,20.125 0,20.125

## Text inside footprints (layer, text, board x,y; h text height)
L1: Mechanical 6 "Land Pattern Adapted for Flow Soldering" at 5.75,16.075 h0.05